# Altium PCB onThyristor.PcbDoc
Units mm, origin at the board's own origin, x right, y up, seen from the top; angles counter-clockwise.
Board outline 152.4 x 101.6 mm, 2 copper layers (Top Layer, Bottom Layer); 16 components, 11 nets, 36 pads, 0 vias.
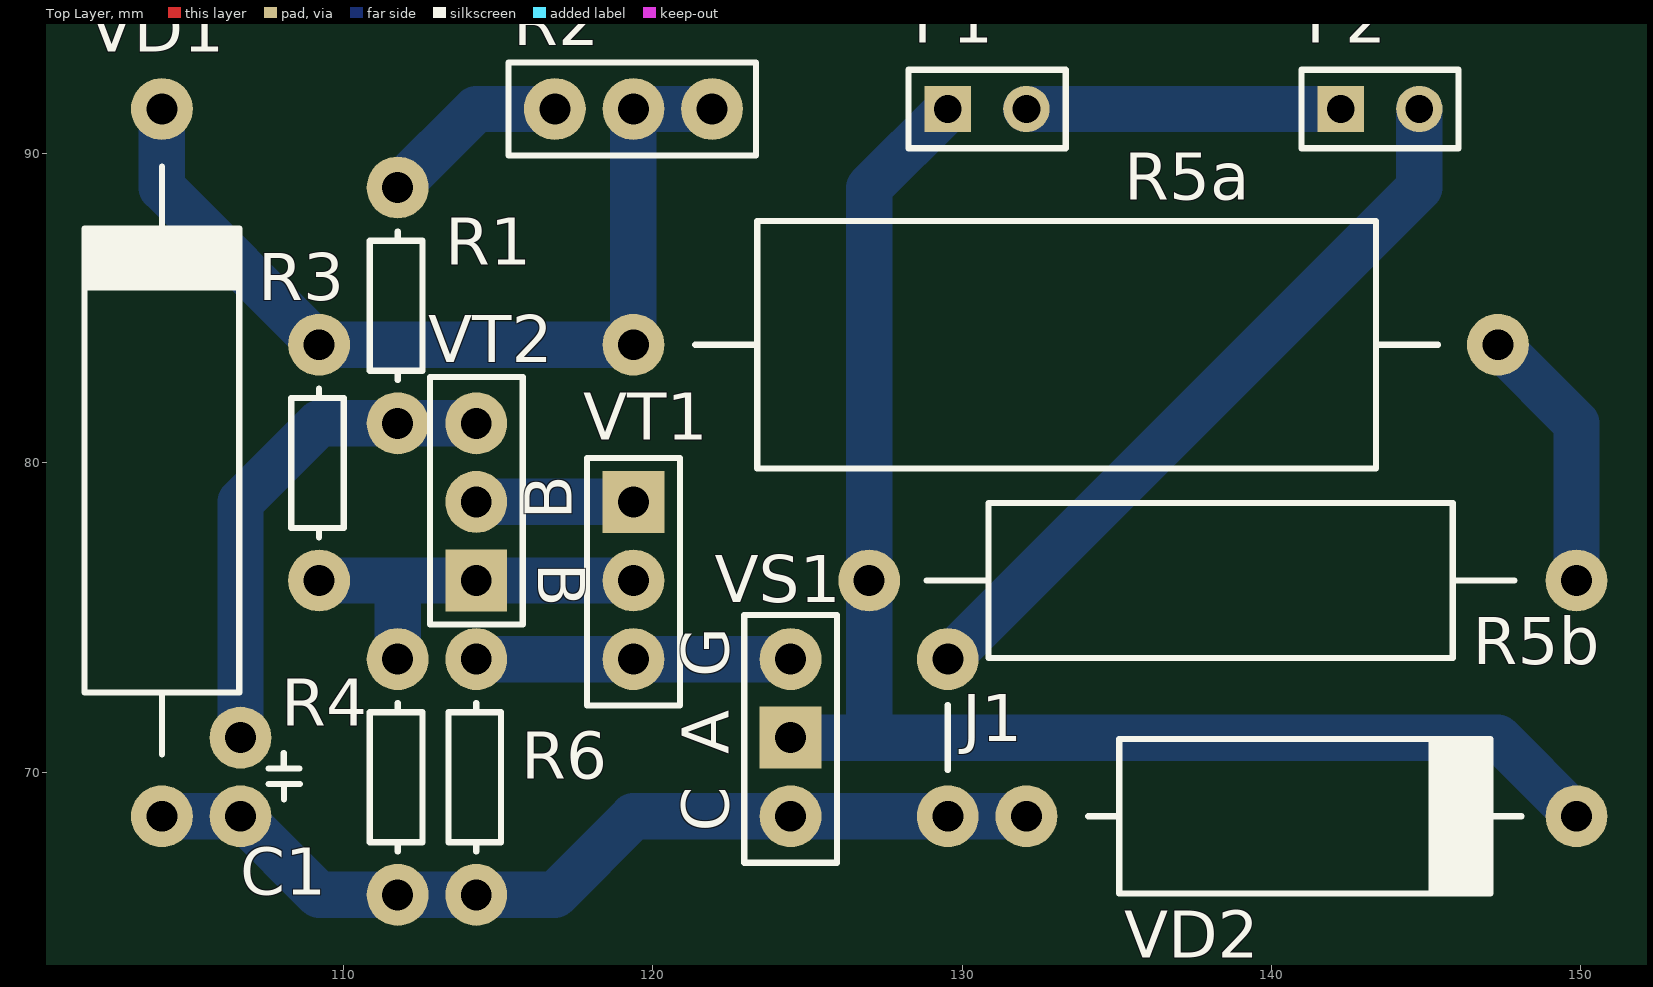
[diagram p0: Top Layer view]
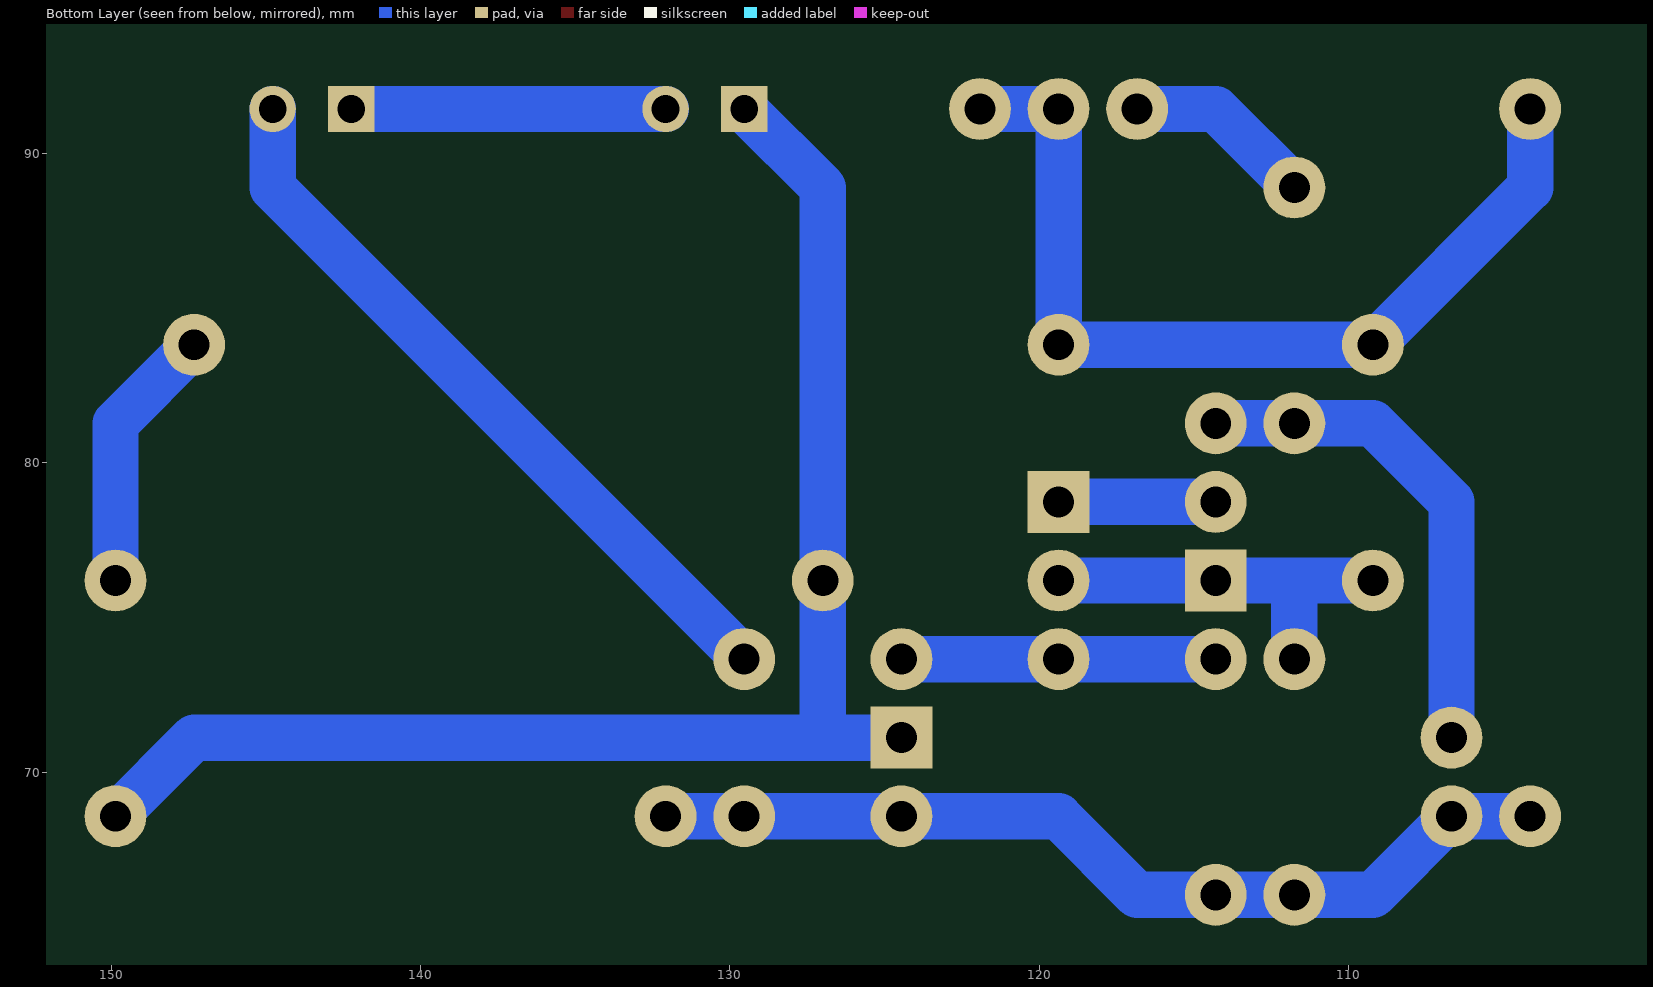
[diagram p1: Bottom Layer view, seen from below]

## Layer stack, top to bottom
Top Solder: solder mask 0.0102, Solder Resist, Dk 3.5
Top Layer: signal copper 0.0356
Dielectric 1: dielectric 0.32, FR-4, Dk 4.8
Bottom Layer: signal copper 0.0356
Bottom Solder: solder mask 0.0102, Solder Resist, Dk 3.5

## Board outline
25.4,25.4 177.8,25.4 177.8,127 25.4,127

## Design rules (kind name [scope] priority, off if disabled: settings)
Clearance [All] p1: gap=0.254
PolygonConnect [All] p1: connectstyle=Relief reliefconductorwidth=0.254 reliefentries=4 polygonreliefangle="90 Angle" airgapwidth=0.254
RoomDefinition onThyristor [InComponentClass('onThyristor')] p1: confinementstyle=ConfineIn formatcopy=TRUE lockcomponents=FALSE outline 0,0 50.8,0 50.8,25.4 0,25.4
RoutingVias [All] p1: holewidth=0.711 width=1.27 viastyle="Through Hole" minholewidth=0.711 minwidth=1.27 maxholewidth=0.711 maxwidth=1.27
SolderMaskExpansion [All] p1: expansion=0.102
Width [All] p1: maxlimit=2 minlimit=0.254 preferedwidth=0.254 minimp=50.000000 maximp=50.000000 favimp=50.000000
29 further rules are at their usual default settings.

## Components (designator, comment, footprint, x,y, rotation, side; value= is the part's Value field where it differs from the comment)
C1 "0.1mF" "Cap p2.54mm (2p)" 106.68,71.12 r270 top
J1 "Jumper" "Jumper 3p" 129.54,68.58 r90 top
P1 "Ext" HDR1X2 129.54,91.44 r0 top
P2 "220V" HDR1X2 142.24,91.44 r0 top
R1 "3.3K" "Res p7.62 (4p)" 111.76,81.28 r90 top
R2 "100K" "PinLine 3x" 116.84,91.44 r0 top
R3 "2,2К" "Res p7.62 (4p)" 109.22,76.2 r90 top
R4 "2,2К" "Res p7.62 (4p)" 111.76,66.04 r90 top
R5a "24K 2W" "Res p27.94 W8mm (12p)" 119.38,83.82 r0 top
R5b "6K 2W" "Res W5mm (10p)" 149.86,76.2 r180 top
R6 "100Om" "Res p7.62 (4p)" 114.3,66.04 r90 top
VD1 "Д814В" "Diode (10p)" 104.14,68.58 r90 top
VD2 "1N4004" "Diode (8p)" 132.08,68.58 r0 top
VS1 "КУ202Н1" "Thyristor (3p) CAG" 124.46,68.58 r90 top
VT1 "КТ315Б" "Trnstr (3p) ECB" 119.38,73.66 r90 top
VT2 "КТ361Б" "Trnstr (3p) ECB" 114.3,81.28 r270 top

## Footprints (in the part's own frame and the unit in brackets; to place one, negate y for a bottom-side part, rotate by r counter-clockwise, add the part's x,y. Pads: shape width x height; smd on the part's side, far side on the other; paste and mask are expansions set on the pad)
"Cap p2.54mm (2p)" [mm]
  round 2 hole 1: 1(0,0) 2(2.54,0)
  silkscreen extent 0.5,0.9 1.99,1.92
"Diode (8p)" [mm]
  round 2 hole 1: A(0,0) K(17.78,0)
  silkscreen extent 2,-2.5 16,2.5
"Diode (10p)" [mm]
  round 2 hole 1: A(0,0) K(22.86,0)
  silkscreen extent 2,-2.5 21,2.5
HDR1X2 [mm] "Connector; Header; 2 Position"
  rect 1.5x1.5 hole 0.9: 1(0,0)
  round 1.5 hole 0.9: 2(2.54,0)
  silkscreen extent -1.27,-1.27 3.81,1.27
"Jumper 3p" [mm]
  round 2 hole 1: 1(0,0) 2(5.08,0)
  silkscreen extent 1.5,0 3.6,0
"PinLine 3x" [mm]
  round 2 hole 1: 1(0,0) 2(5.08,0) 3(2.54,0)
  silkscreen extent -1.5,-1.5 6.5,1.5
"Res p7.62 (4p)" [mm] "L p7.62; horisontal"
  round 2 hole 1: 1(0,0) 2(7.62,0)
  silkscreen extent 1.4,-0.8 6.2,0.9
"Res p27.94 W8mm (12p)" [mm] "L p27.94 (11pin); horisontal"
  round 2 hole 1: 1(0,0) 2(27.94,0)
  silkscreen extent 2,-4 26,4
"Res W5mm (10p)" [mm] "L p22.86 (10pin); horisontal"
  round 2 hole 1: 1(0,0) 2(22.86,0)
  silkscreen extent 2,-2.5 21,2.5
"Thyristor (3p) CAG" [mm] "3 Pin in line (Cat-Anod-Gate)"
  rect 2x2 hole 1: A(2.54,0)
  round 2 hole 1: C(0,0) G(5.08,0)
  silkscreen extent -1.5,-1.5 6.5,1.5
"Trnstr (3p) ECB" [mm] "L p7.62; horisontal"
  rect 2x2 hole 1: B(5.08,0)
  round 2 hole 1: C(2.54,0) E(0,0)
  silkscreen extent -1.5,-1.5 6.5,1.5

## Part data
C1: library part Cap, "Capacitor"
P1 P2: library part "Header 2", "Header, 2-Pin"
R1 R3 R4 R5a R5b R6: library part Resistor
R2: library part "Resistor Adj"
VD1: library part "Diode Zener", "Stabilitron"
VD2: library part Diode
VS1: library part Thyristor
VT1: library part NPN
VT2: library part PNP

## Nets (pads, with @x,y where several pads share a name; then routed paths per layer and width w, separated by ;. In a path a pad name is that pad's centre, name@x,y a point inside that pad or via, vN(x,y) a via of type N, cw(c..) or ccw(c..) an arc to the next point about the centre after c; other vN are vias at no path point)
NetC1_1: C1.1 R1.1 VT2.E | length 16.3
  Bottom Layer w1.5: C1.1 106.68,78.74 109.22,81.28 R1.1 VT2.E
NetC1_2: C1.2 J1.1 R4.1 R6.1 VD1.A VD2.A VS1.C | length 30
  Bottom Layer w1.5: VD1.A C1.2 109.22,66.04 R6.1 116.84,66.04 119.38,68.58 VS1.C J1.1 VD2.A
NetJ1_2: J1.2 P2.2 | length 24.1
  Bottom Layer w1.5: J1.2 144.78,88.9 P2.2
NetP1_1: P1.1 R5b.2 VD2.K VS1.A | length 47.8
  Bottom Layer w1.5: VS1.A 127,71.12 ; P1.1 127,88.9 R5b.2 127,71.12 ; VD2.K 147.32,71.12 127,71.12
NetP1_2: P1.2 P2.1 | length 10.2
  Bottom Layer w1.5: P1.2 P2.1
NetR1_2: R1.2 R2.1 | length 6.1
  Bottom Layer w1.5: R1.2 114.3,91.44 R2.1
NetR2_2: R2.2 R2.3 R3.2 R5a.1 VD1.K | length 30
  Bottom Layer w1.5: VD1.K 104.14,88.9 R3.2 R5a.1 R2.3 R2.2
NetR3_1: R3.1 R4.2 VT1.C VT2.B | length 12.7
  Bottom Layer w1.5: R3.1 111.76,76.2 ; R4.2 111.76,76.2 ; VT1.C VT2.B 111.76,76.2
NetR5a_2: R5a.2 R5b.1 | length 8.7
  Bottom Layer w1.5: R5a.2 149.86,81.28 R5b.1
NetR6_2: R6.2 VS1.G VT1.E | length 10.2
  Bottom Layer w1.5: R6.2 VT1.E VS1.G
NetVT1_B: VT1.B VT2.C | length 5.1
  Bottom Layer w1.5: VT2.C VT1.B

## Text inside footprints (layer, text, board x,y; h text height)
VS1: Top Overlay "A" at 122.46,70.58 h1.52 r90; Top Overlay "C" at 122.46,68.08 h1.52 r90; Top Overlay "G" at 122.46,73.08 h1.52 r90
VT1: Top Overlay "B" at 117.38,78.16 h1.52 r90
VT2: Top Overlay "B" at 116.3,76.78 h1.52 r270